# Altium PCB Master.PcbDoc (part 2 of 4)
Units mm, origin at the board's own origin, x right, y up, seen from the top; angles counter-clockwise.
Board outline 150 x 100 mm, 4 copper layers (Top Layer, GND-Layer, PWR-Layer, Bottom Layer), stack 1.586 mm thick; 231 components, 152 nets, 715 pads, 841 vias.
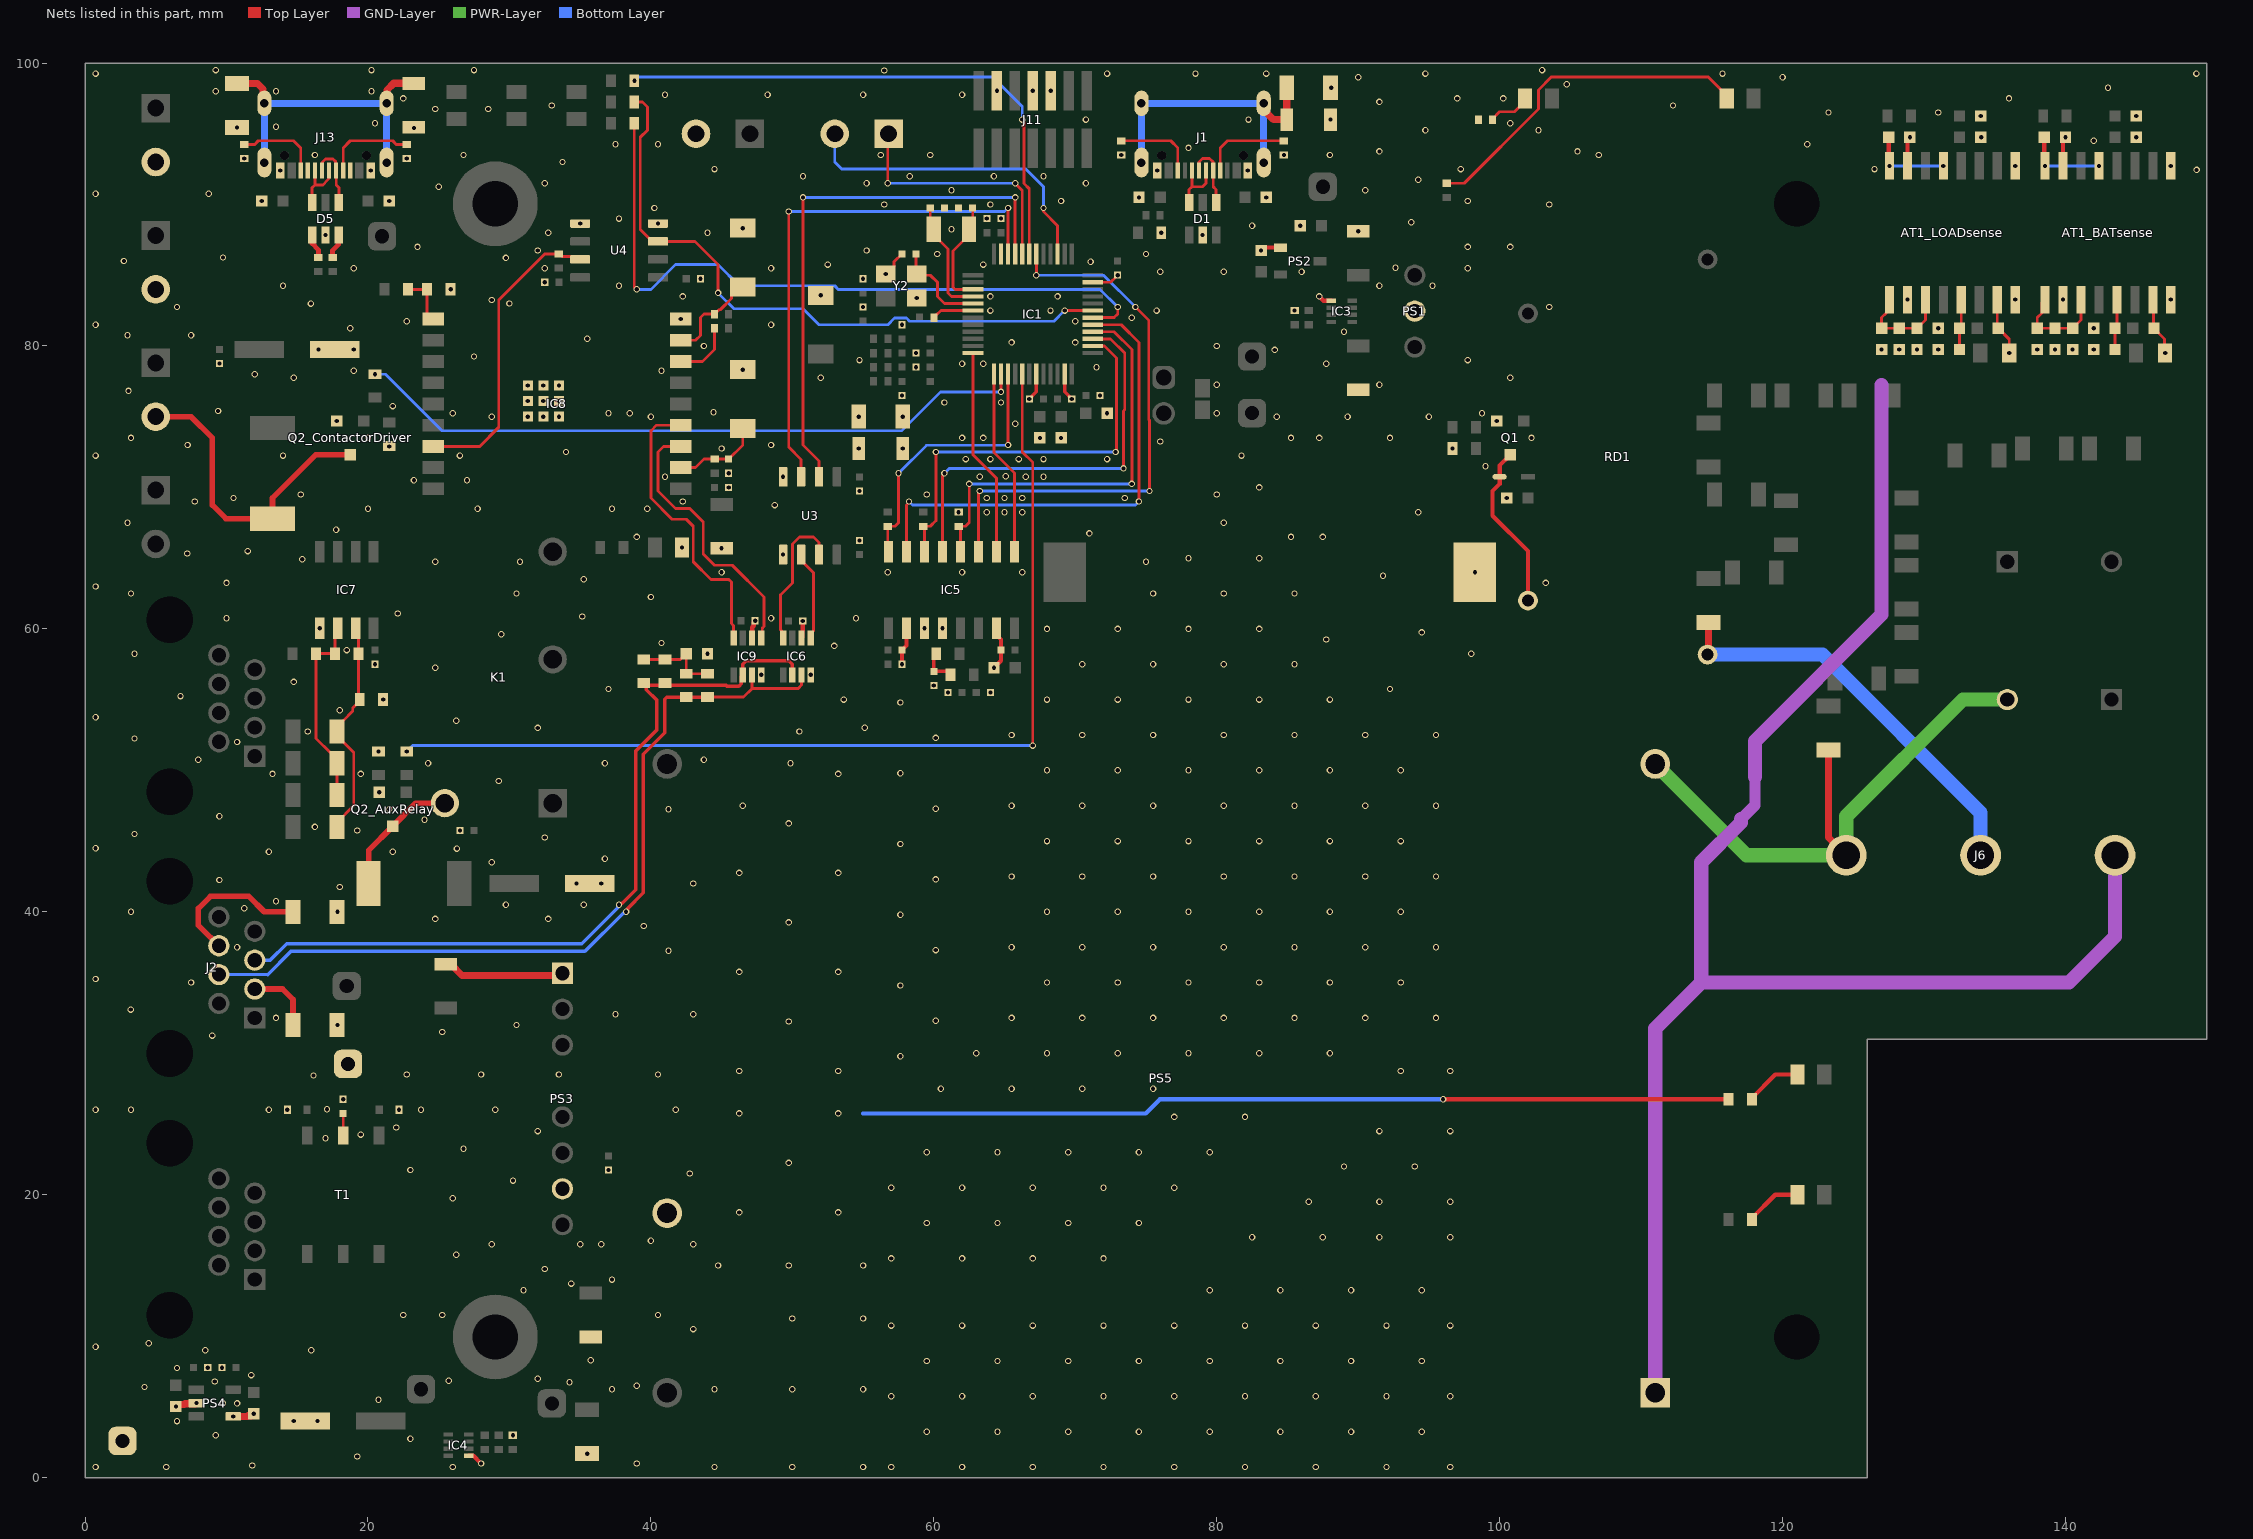
[diagram p4: the nets of this part, all layers, seen from the top]

## Part data
AT1_BATsense AT1_LOADsense: "Attenuator or Isolator", Manufacturer_Name="Texas Instruments", Mouser Part Number=595-AMC3330QDWERQ1, Arrow Part Number=AMC3330QDWERQ1, Arrow Price/Stock=https://www.arrow.com/en/products/amc3330qdwerq1/texas-instruments?utm_currency=USD&region=nac, Datasheet Link=https://www.ti.com/lit/ds/symlink/amc3330.pdf?ts=1605812770714&ref_url=https%253A%252F%252Fwww.ti.com%252Fsitesearch%252Fdocs%252Funiversalsearch.tsp%253FsearchTerm%253DAMC3330DWE, Height=2.65mm, Manufacturer_Part_Number=AMC3330QDWERQ1, Mouser Price/Stock=https://www.mouser.co.uk/ProductDetail/Texas-Instruments/AMC3330QDWERQ1?qs=81r%252BiQLm7BThq9fK1XpIYg%3D%3D
C1 C9 C15 C18 C19 C20 C21 C25 C28 C29 C30 C32 C38 C39 C40 C41 C43 C55 C59 C60 C68_AuxRelay C68_ContactorDriver: library part CMP-001-01308-5, "GTT Standard 0402 non-polarized capacitor", Case/Package=0402, JLCPCB Part #=C1525, Category="Multilayer Ceramic Chip Capacitors", Ceramic Type=X7R, Pins=2
  C30 C32 C38 C39 C40 C41 C43 C59 C60: ClassName=TPL_Trans
C2 C3 C33 C56 C57: library part CMP-001-01309-1, "GTT Standard 0603 non-polarized capacitor", Case/Package=0603, JLCPCB Part #=C23630, Category="Multilayer Ceramic Chip Capacitors", Ceramic Type=X7R, Pins=2
  C33: ClassName=TPL_Trans
C4 C58 C63: library part CMP-001-01311-1, "GTT Standard 1206 non-polarized capacitor", Case/Package=1206, JLCPCB Part #=C9196, Voltage Rating=2kV, Category="Multilayer Ceramic Chip Capacitors", Ceramic Type=X7R, Pins=2
C5 C6: library part CMP-001-01308-5, "GTT Standard 0402 non-polarized capacitor", Case/Package=0402, JLCPCB Part #=C32949, Category="Multilayer Ceramic Chip Capacitors", Ceramic Type=X7R, Pins=2
C7 C8: library part CMP-001-01308-5, "GTT Standard 0402 non-polarized capacitor", Case/Package=0402, JLCPCB Part #=C1549, Category="Multilayer Ceramic Chip Capacitors", Ceramic Type=X7R, Pins=2
C10 C13 C14 C16 C48_BATsense C48_LOADsense C51_BATsense C51_LOADsense: library part CMP-001-01309-1, "GTT Standard 0603 non-polarized capacitor", Case/Package=0603, JLCPCB Part #=C15849, Category="Multilayer Ceramic Chip Capacitors", Ceramic Type=X7R, Pins=2
C11 C12 C22 C24: library part CMP-001-01311-1, "GTT Standard 1206 non-polarized capacitor", Case/Package=1206, JLCPCB Part #=C12891, Voltage Rating=25V, Category="Multilayer Ceramic Chip Capacitors", Ceramic Type=X7R, Pins=2
C17 C26 C27: library part CMP-001-01309-1, "GTT Standard 0603 non-polarized capacitor", Case/Package=0603, JLCPCB Part #=C19666, Category="Multilayer Ceramic Chip Capacitors", Pins=2
  C17: Ceramic Type=X7R
  C26 C27: Ceramic Type=X5R
C23 C62_AuxRelay C62_ContactorDriver: "Capacitor Polarised", JLCPCB Part #=C176664, Manufacturer_Name=Lelon, Datasheet Link=https://www.mouser.de/datasheet/2/231/161587198639-2307150.pdf, Height=8mm, Manufacturer_Part_Number=VEJ101M1ETR-0607
C31: library part CMP-001-01308-5, "GTT Standard 0402 non-polarized capacitor", Case/Package=0402, JLCPCB Part #=C1523, Category="Multilayer Ceramic Chip Capacitors", Ceramic Type=X7R, ClassName=TPL_Trans, Pins=2
C34 C36: library part CMP-001-01308-5, "GTT Standard 0402 non-polarized capacitor", Case/Package=0402, JLCPCB Part #=C190580, Category="Multilayer Ceramic Chip Capacitors", Ceramic Type=X7R, ClassName=TPL_Trans, Pins=2
C35 C69_BATsense C69_LOADsense C71_BATsense C71_LOADsense: library part CMP-001-01308-5, "GTT Standard 0402 non-polarized capacitor", Case/Package=0402, JLCPCB Part #=C1538, Category="Multilayer Ceramic Chip Capacitors", Ceramic Type=X7R, Pins=2
  C35: ClassName=TPL_Trans
C37: library part CMP-001-01308-5, "GTT Standard 0402 non-polarized capacitor", Case/Package=0402, JLCPCB Part #=C1546, Category="Multilayer Ceramic Chip Capacitors", Ceramic Type=X7R, ClassName=TPL_Trans, Pins=2
C42: library part CMP-001-01309-1, "GTT Standard 0603 non-polarized capacitor", Case/Package=0603, JLCPCB Part #=C1622, Category="Multilayer Ceramic Chip Capacitors", Ceramic Type=X7R, Pins=2
C44 C46_BATsense C46_LOADsense C52_BATsense C52_LOADsense C53_BATsense C53_LOADsense: library part CMP-001-01309-1, "GTT Standard 0603 non-polarized capacitor", Case/Package=0603, JLCPCB Part #=C14663, Category="Multilayer Ceramic Chip Capacitors", Ceramic Type=X7R, Pins=2
C45_BATsense C45_LOADsense: library part CMP-001-01309-1, "GTT Standard 0603 non-polarized capacitor", Case/Package=0603, JLCPCB Part #=C57112, Category="Multilayer Ceramic Chip Capacitors", Ceramic Type=X7R, Pins=2
C47_BATsense C47_LOADsense C49_BATsense C49_LOADsense C50_BATsense C50_LOADsense: library part CMP-001-01309-1, "GTT Standard 0603 non-polarized capacitor", Case/Package=0603, JLCPCB Part #=C1588, Category="Multilayer Ceramic Chip Capacitors", Ceramic Type=X7R, Pins=2
C54: library part CMP-001-01311-1, "GTT Standard 1206 non-polarized capacitor", Case/Package=1206, JLCPCB Part #=C13585, Category="Multilayer Ceramic Chip Capacitors", Ceramic Type=X7R, Pins=2
C61: library part CMP-001-01308-5, "GTT Standard 0402 non-polarized capacitor", Case/Package=0402, JLCPCB Part #=C52923, Category="Multilayer Ceramic Chip Capacitors", Ceramic Type=X7R, Pins=2
C70_BATsense C70_LOADsense: library part CMP-001-01308-5, "GTT Standard 0402 non-polarized capacitor", Case/Package=0402, JLCPCB Part #=C16772, Category="Multilayer Ceramic Chip Capacitors", Ceramic Type=X7R, Pins=2
D1 D5: library part CMP-004-00059-1, Design Item ID=USBLC6-2SC6, Source=USBLC6-2SC6.SchLib
D2 D3: library part CMP-004-00097-1, "PESD5V0V1BB - Very low capacitance bidirectional ESD protection diode", Manufacturer_Name=Nexperia, Mouser Part Number=771-PESD5V0V1BB115, Arrow Part Number=PESD5V0V1BB,115, Arrow Price/Stock=https://www.arrow.com/en/products/pesd5v0v1bb115/nexperia?region=nac, Datasheet Link=https://assets.nexperia.com/documents/data-sheet/PESD5V0V1BB.pdf, Design Item ID=PESD5V0V1BB,115, Height=0.65mm, Manufacturer_Part_Number=PESD5V0V1BB,115, Mouser Price/Stock=https://www.mouser.co.uk/ProductDetail/Nexperia/PESD5V0V1BB115?qs=GcY6OjH1zdkfLKV5vNnV%252BA%3D%3D, Source=TempSchematics.schlib
D4: library part CMP-07163-000040-1, "DIODE GEN PURP 75V 150MA SOD323F", Average Rectified Current=150mA, Forward Voltage=1V, Max Forward Surge Current (Ifsm)=2A, Max Operating Temperature=150°C, Max Repetitive Reverse Voltage (Vrrm)=75V, Min Operating Temperature=-55°C, Package Quantity=1, Peak Reverse Current=5uA, Power Dissipation=200mW, Contact Plating=Tin, Element Configuration=Single, Forward Current=150mA, Height=1mm, Lead Free="Lead Free", Length=1.8mm, Max Reverse Voltage (DC)=75V, Mount="Surface Mount", Number of Pins=2, Packaging="Tape and Reel", Radiation Hardening=No, REACH SVHC="No SVHC", Recovery Time=4ns, Reverse Recovery Time=4ns, Reverse Voltage=75V, Weight=0.0276g, Width=1.35mm
D6_AuxRelay D6_ContactorDriver: library part CMP-02539-000066-1, "DIODE SCHOTTKY 40V 3A DO214AB", Average Rectified Current=3A, Case/Package=SMC, Forward Voltage=500mV, JLCPCB Part #=C3008890, Max Operating Temperature=125°C, Max Repetitive Reverse Voltage (Vrrm)=40V, Max Reverse Current=500uA, Max Surge Current=100A, Min Operating Temperature=-55°C, Package Quantity=3500, Element Configuration=Single, Forward Current=3A, Max Reverse Leakage Current=500uA, Max Reverse Voltage (DC)=40V, Mount="Surface Mount", Number of Pins=2, Packaging="Tape and Reel", Peak Non-Repetitive Surge Current=100A, Radiation Hardening=No, RoHS Compliant=Yes, Series=-
FB1: library part CMP-0686-00557-7, "Chip Ferrite Bead, 0603, 120Ω @ 100MHz, 0.05Ω, 25%, 2A", Case Code (Imperial)=0603, Case Code (Metric)=1608, Current Rating=2A, DC Resistance (DCR)=50mR, Frequency=100MHz, Max Operating Temperature=125°C, Min Operating Temperature=-55°C, Package Quantity=1, Tolerance=25%, Case/Package=0603, Core Material=Ferrite, DC Current=2A, Depth=0.8mm, Height=0.8mm, Impedance=120R, Lead Free="Lead Free", Length=1.6mm, Material=Steel, Max Current Rating=2A, Max DC Current=2A, Number of Circuits=1, Number of Lines=1, Number of Pins=2, Packaging="Tape and Reel", Radiation Hardening=No, REACH SVHC="No SVHC", RoHS Compliant=Yes, Shielding=Unshielded, Termination=SMD/SMT, Test Frequency=100MHz, Width=0.8mm
IC1: library part CMP-031-00032-4, "ARM Microcontrollers - MCU Mainstream Arm Cortex-M4+ MCU 170MHz with 512Kbytes of Flash memory", Manufacturer_Name=STMicroelectronics, Mouser Part Number=511-STM32G491CET6, Arrow Part Number=STM32G491CET6, Arrow Price/Stock=https://www.arrow.com/en/products/stm32g491cet6/stmicroelectronics?region=nac, Datasheet Link=https://cz.mouser.com/datasheet/2/389/dm00654712-2042072.pdf, Design Item ID=STM32G491CET6, Height=1.6mm, Manufacturer_Part_Number=STM32G491CET6, Mouser Price/Stock=https://www.mouser.co.uk/ProductDetail/STMicroelectronics/STM32G491CET6?qs=eP2BKZSCXI5LxAF%2FNuF5Tg%3D%3D, Source=TempSchematics.schlib
IC3 IC4: library part CMP-031-00025-3, "Power MUX", Manufacturer_Name="Texas Instruments", Mouser Part Number=595-TPS2116DRLR, Arrow Part Number=TPS2116DRLR, Arrow Price/Stock=https://www.arrow.com/en/products/tps2116drlr/texas-instruments?region=nac, Datasheet Link=https://www.ti.com/lit/gpn/tps2116, Design Item ID=TPS2116DRLR, Height=0.6mm, Manufacturer_Part_Number=TPS2116DRLR, Mouser Price/Stock=https://www.mouser.co.uk/ProductDetail/Texas-Instruments/TPS2116DRLR?qs=aP1CjGhiNiGo3XAyXcVPaQ%3D%3D, Source=TempSchematics.schlib
IC5: library part CMP-031-00034-2, "Interface - Specialized Isolated network high speed transceiver", Manufacturer_Name=NXP, Mouser Part Number=841-MC33664ATL1EG, Arrow Part Number=MC33664ATL1EG, Arrow Price/Stock=https://www.arrow.com/en/products/mc33664atl1eg/nxp-semiconductors?region=nac, Datasheet Link=http://www.nxp.com/docs/en/data-sheet/MC33664_SDS.pdf, Design Item ID=MC33664ATL1EG, Height=1.75mm, Manufacturer_Part_Number=MC33664ATL1EG, Mouser Price/Stock=https://www.mouser.co.uk/ProductDetail/NXP-Semiconductors/MC33664ATL1EG?qs=ifm8N2KdrcYav8QSnSftXQ%3D%3D, Source=TempSchematics.schlib
IC6 IC9: "Integrated Circuit", JLCPCB Part #=C32428067, Manufacturer_Name=TI, Datasheet Link=https://www.ti.com/lit/ds/symlink/tcan3404-q1.pdf, Height=1.1mm, Manufacturer_Part_Number=TCAN3404DDFRQ1
IC7: "Integrated Circuit", Arrow Part Number=SP3485EN-L/TR, JLCPCB Part #=C8963, Manufacturer_Name=MaxLinear, Mouser Part Number=701-SP3485EN-L/TR, Arrow Price/Stock=https://www.arrow.com/en/products/sp3485en-ltr/maxlinear-inc?region=nac, Datasheet Link=https://www.maxlinear.com/ds/sp3485.pdf, Height=1.75mm, Manufacturer_Part_Number=SP3485EN-L/TR, Mouser Price/Stock=https://www.mouser.co.uk/ProductDetail/MaxLinear/SP3485EN-L-TR?qs=3EMgrMjM0fbQ17liGrle%2Fg%3D%3D
IC8: "Integrated Circuit", Manufacturer_Name="Espressif Systems", Mouser Part Number=356-ESP32C3WROM02UN4, Datasheet Link=https://www.espressif.com/sites/default/files/documentation/esp32-c3-wroom-02_datasheet_en.pdf, Height=3.35mm, Manufacturer_Part_Number=ESP32-C3-WROOM-02U-N4, Mouser Price/Stock=https://www.mouser.co.uk/ProductDetail/Espressif-Systems/ESP32-C3-WROOM-02U-N4?qs=pBJMDPsKWf2Ces2aXBSNjQ%3D%3D
J1 J13: library part CMP-002-000088-9, "WR-USB 2.0 Type C, Receptacle, Horizontal, SMT", Manufacturer="Wurth Elektronik", Manufacturer Part Number=629722000214, Operating Temperature Max=85°C, Operating Temperature Min=-40°C, Rated Current=5A, Working Voltage=20VAC, Application="USB 2.0", Category="Input/Output Connectors", Component Type=Standard, ComponentLink1Description="Website Link", ComponentLink1URL=https://www.we-online.com/redexpert/article/629722000214?ad, ComponentLink2Description="Datasheet Link", ComponentLink2URL=https://www.we-online.com/redexpert/spec/629722000214?ad, Design Item ID=629722000214, Gender=Receptacle, Interface Type="Type C", Match Code=WR-USB, Mount="Surface Mount", Number of Pins=16, Number of Ports=1, Orientation=Horizontal, Packaging="Tape and Reel", Pin Count=13, Source=WR-USB.SchLib
J2 J3 J10: "Connector", Manufacturer_Name=FG, Datasheet Link=https://www.lcsc.com/datasheet/lcsc_datasheet_2306211558_FG-RJ-804-1-6_C7205183.pdf, Height=11.7mm, Manufacturer_Part_Number=RJ-804-1-6
J4 J5 J7 J8 J9 J12: "Connector", Manufacturer_Name="Cixi Dibo Electronics Co.,LTD", Datasheet Link=https://datasheet.lcsc.com/szlcsc/1910111742_DIBO-DB125-3-81-2P_C395878.pdf, Height=8.8mm, Manufacturer_Part_Number=DB125-3.81-2P
J6: "Connector", JLCPCB Part #=C162697, Manufacturer_Name="Ningbo Kangnex", Datasheet Link=https://datasheet.lcsc.com/szlcsc/Ningbo-Kangnex-Elec-HB9500-3_C162697.pdf, Height=13.2mm, Manufacturer_Part_Number=HB9500M-9.5-3P
J11: library part CMP-02766-001412-1, "CONN HEADER SMD 14POS 1.27MM", Housing Color=Black, Max Operating Temperature=125°C, Min Operating Temperature=-55°C, Contact Material=Bronze, Contact Plating=Gold, Depth=5.84mm, Gender=Male, Housing Material=Polymer, Lead Free="Lead Free", Length=8.89mm, Number of Contacts=14, Number of Rows=2, Orientation=Straight, Packaging=Rail/Tube, Pitch=1.27mm, Radiation Hardening=No, RoHS Compliant=Yes, Termination=Solder
K1: library part CMP-08822-000148-1, "RELAY GEN PURPOSE SPST 10A 5V", Coil Current=40mA, Coil Power=200mW, Coil Resistance=125R, Coil Voltage (DC)=5V, Contact Current Rating=10A, Max Operating Temperature=105°C, Max Voltage Rating (AC)=277V, Max Voltage Rating (DC)=30V, Min Operating Temperature=-40°C, Package Quantity=400, Power Consumption=2mW, Approvals=UL, Coil Type=Non-Latching, Contact Material=Silver, Current Rating=10A, Depth=10.3mm, Length=20.3mm, Max Current Rating=10A, Mount="Through Hole", Number of Pins=4, Operate Time=10ms, Packaging=Bulk, Radiation Hardening=No, Relay Type="General Purpose", Release Time=5ms, Series=G5Q, Termination="PC Pin", Throw Configuration=SPST, Voltage Rating (AC)=277V, Weight=6.5g
LED1 LED3: library part KT-0805G, "LED", JLCPCB Part #=C34499, Manufacturer_Name="Hubei KENTO Elec", Datasheet Link=https://jlcpcb.com/api/file/downloadByFileSystemAccessId/8639582106239348736, Height=0.95mm, Manufacturer_Part_Number=KT-0805G
LED2 LED4 LED9: "LED", JLCPCB Part #=C2297, Manufacturer_Name="Hubei KENTO Elec", Datasheet Link=https://jlcpcb.com/api/file/downloadByFileSystemAccessId/8639582106239348736, Height=0.95mm, Manufacturer_Part_Number=KT-0805G
LED7: library part KT-0805G, "LED", JLCPCB Part #=C84256, Manufacturer_Name="Hubei KENTO Elec", Datasheet Link=https://jlcpcb.com/api/file/downloadByFileSystemAccessId/8639582106239348736, Height=0.95mm, Manufacturer_Part_Number=KT-0805G
LED8 LED10: library part KT-0805G, "LED", JLCPCB Part #=C2296, Manufacturer_Name="Hubei KENTO Elec", Datasheet Link=https://jlcpcb.com/api/file/downloadByFileSystemAccessId/8639582106239348736, Height=0.95mm, Manufacturer_Part_Number=KT-0805G
P1: library part CMP-002-00755-1, "WR-PHD Pin Header, THT, Vertical, pitch 2.54mm, 1 Row, 2P", Contact Resistance=20mO, Manufacturer="Wurth Elektronik", Operating Temperature Max=105°C, Operating Temperature Min=-40°C, Rated Current=3A, Withstanding Voltage=500V, Working Voltage=250V, Category="Board-to-Board Connectors", Component Type=Standard, ComponentLink1Description="Website Link", ComponentLink1URL=https://www.we-online.com/redexpert/article/61300211121?ad, ComponentLink2Description="Datasheet Link", ComponentLink2URL=https://www.we-online.com/redexpert/spec/61300211121?ad, Design Item ID=61300211121, Gender="Pin Header", Manufacturer Part Number=61300211121, Match Code=WR-PHD, Mount="Through Hole", Number of Rows=1, Orientation=Vertical, Packaging=Bag, Pin Count=2, Pins=2, Pitch=2.54mm, Source=WR-PHD.SchLib
PS1: "Power Supply", JLCPCB Part #=C19188491, Manufacturer_Name=EVISUN, Height=10.41mm, Manufacturer_Part_Number=K7805-500R3
PS2: "Power Supply", Manufacturer_Name=Torex, Mouser Part Number=865-XC6206P332MR-G, Datasheet Link=https://www.torexsemi.com/file/xc6206/XC6206.pdf, Height=1.3mm, Manufacturer_Part_Number=XC6206P332MR-G, Mouser Price/Stock=https://www.mouser.co.uk/ProductDetail/Torex-Semiconductor/XC6206P332MR-G?qs=AsjdqWjXhJ%2FXxNpRY3zZ8g%3D%3D
PS3: "Power Supply", JLCPCB Part #=C22437321, Manufacturer_Name=EVISUN, Datasheet Link=https://jlc-prod-smt.oss-eu-central-1.aliyuncs.com/smtDataManualFile/8763072730084188160-C22437321.pdf?response-content-disposition=attachment%3B%20filename%3DC22437321.pdf%3B%20filename%2A%3DUTF-8%27%27C22437321.pdf&x-oss-date=20260715T193454Z&x-oss-expires=3600&x-oss-security-token=CAISgAN1q6Ft5B2yfSjIr5vGB4%2FWvadn2vqmc1aEsUE0QuZpjqjbpjz2IHhMdHJsAOodtv0%2FmmhT6PkclqRLcbhpcmfjV%2BZHzLB8qZ1MhF5f4J7b16cNrbH4M4H6aXeirtuwDsz9SNTCALjPD3nPii50x5bjaDymRCbLGJaViJlhHLN1Ow6jdmhpCctxLAlvo9NgFxm3D%2Fu2NQPwiWf9FVdhvhEG6Vly8qOi2MaRmFy8yFTx0b0SvJ%2BjYMrmPctoN9JnSdC5mfdzau3a1TJ84gRD0a5wkaVA1zbDs5bfISEIuUzebreLqY03dV4mOvdqIcMe8qigz88fk%2FfIioH6xyxKOexoSCnFTOiiupCcQLPyao9jLu6iayqViY7QaIOTqQohZmkAMwVOasAsI3Ngh4zF97Qt0cVNkXO9gWfLI8DtuMleWgprXccO%2BnSgc5lCkRRYwGs1287ugXlSQzo890KPDAEovaKCnZ2ZSfh7Y4sNknI6i%2Bfc2Se2MIkIyKE0YqKWD5sagAECs9NCpk8KgfXfWYxhKhKZsha9ngqEXyXXVVOpb2GGT6djF3S%2FLTKh30%2B6uTt7oH6XhzPlB7WR%2Fa7FsvHfaJ62Hu2KaBZEBf7KJcteyMD33hzIrNZl9%2F9XvPXuCryTgxV1ie4rkrvTaUkWCQr%2BRp6R1%2FN9Ic7TFTQ1orsPZrHwHCAA&x-oss-signature-version=OSS4-HMAC-SHA256&x-oss-credential=STS.NXsL5bPxFm8Mqp5UAaNiEampD%2F20260715%2Feu-central-1%2Foss%2Faliyun_v4_request&x-oss-signature=73c165591a835ffcff11ee9ad605e23bde33f7af0c5ec7bf6709df0808843322, Height=12.25mm, Manufacturer_Part_Number=WRB1203S-3WR2
PS4: library part CMP-04917-000028-1, "IC REG LINEAR 3.3V 1A SOT23-5", Dropout Voltage=1350mV, Manufacturer="Texas Instruments", Max Junction Temp=+125°C, Max Supply Voltage=5.5V, Min Supply Voltage=1.45V, Output Current=1A, Output Voltage=3.3V, Package=DBV0005A, Temperature="-40°C to +125°C", Temperature Range Low=-40°C, Accuracy Percentage=1%, Automotive=No, Category=IC, ComponentLink2Description=Datasheet, ComponentLink2URL=http://www.ti.com/lit/ds/symlink/tlv757p.pdf, Device Class L1="Integrated Circuits (ICs)", Device Class L2="Power Management ICs", Device Class L3="Voltage Regulators - Linear", Digikey Description="IC REG LINEAR 3.3V 1A SOT23-5", Height=1.45mm, Ipc Land Pattern Name=SOT95P280X145-5, Lead Free=Yes, Manufacturer Part Number=TLV75733PDBVR, Mouser Description="1-A low-IQ small-size low-dropout (LDO) regulator 5-SOT-23 -40 to 125", Number Of Outputs=1, Octopart=https://octopart.com/tlv75733pdbvr-texas+instruments-91437073, Output Type=Fixed, RoHS=TRUE, Standoff Height=0mm, Temperature Range High=+125°C
PS5: "Power Supply", Manufacturer_Name="Mean Well", Arrow Part Number=DDRH-15-12P, Arrow Price/Stock=https://www.arrow.com/en/products/ddrh-15-12p/mean-well-enterprises?utm_currency=USD&region=nac, Datasheet Link=https://www.meanwell.com/webapp/product/search.aspx?prod=DDRH-15, Height=25.03mm, Manufacturer_Part_Number=DDRH-15-12P
Q1 Q2_AuxRelay Q2_ContactorDriver: library part CMP-83955-000006-1, "MOSFET N-CH 30V 5.7A SOT23", Case/Package=SOT-23, Continuous Drain Current (ID)=5.7A, Drain to Source Voltage (Vdss)=30V, Gate to Source Voltage (Vgs)=12V, Input Capacitance=630pF, Max Operating Temperature=150°C, Max Power Dissipation=1.4W, Min Operating Temperature=-55°C, Lead Free="Lead Free", Mount="Surface Mount", Number of Elements=1, Number of Pins=3, Packaging="Tape and Reel", Power Dissipation=1.4W, Radiation Hardening=No, Rds On Max=26.5mR
R1: library part CMP-009-00204-17, "GTT Standard 0402 Resistor", Case/Package=0402, JLCPCB Part #=C25079, Power=62.5mW, Tolerance=1%, Voltage Rating=50V, Design Item ID="RES 0402", Mounting Technology=SMD, Source=Passives.SchLib
R2 R12: library part CMP-009-00204-17, "GTT Standard 0402 Resistor", Case/Package=0402, JLCPCB Part #=C25779, Power=62.5mW, Tolerance=1%, Voltage Rating=50V, Design Item ID="RES 0402", Mounting Technology=SMD, Source=Passives.SchLib
R3 R5 R22 R23 R26 R60 R62: library part CMP-009-00204-17, "GTT Standard 0402 Resistor", Case/Package=0402, JLCPCB Part #=C25905, Power=62.5mW, Tolerance=1%, Voltage Rating=50V, Design Item ID="RES 0402", Mounting Technology=SMD, Source=Passives.SchLib
R4 R11: library part CMP-009-00206-3, "GTT Standard 0603 Resistor", Case/Package=0603, JLCPCB Part #=C23254, Power=62.5mW, Tolerance=1%, Voltage Rating=50V, Mounting Technology=SMD
R6 R47_BATsense R47_LOADsense R48_BATsense R48_LOADsense R49_BATsense R49_LOADsense R50_BATsense R50_LOADsense R51_BATsense R51_LOADsense R52_BATsense R52_LOADsense R53_BATsense R53_LOADsense R54_BATsense R54_LOADsense R64 R69: library part CMP-009-00208-3, "GTT Standard 1206 Resistor", Case/Package=1206, JLCPCB Part #=C17927, Power=62.5mW, Tolerance=1%, Voltage Rating=50V, Mounting Technology=SMD
R7 R8 R45_BATsense R45_LOADsense R46_BATsense R46_LOADsense R58 R59 R65 R66: library part CMP-009-00204-17, "GTT Standard 0402 Resistor", Case/Package=0402, JLCPCB Part #=C25752, Power=62.5mW, Tolerance=1%, Voltage Rating=50V, Design Item ID="RES 0402", Mounting Technology=SMD, Source=Passives.SchLib
R9 R37 R38 R39 R42: library part CMP-009-00208-3, "GTT Standard 1206 Resistor", Case/Package=1206, JLCPCB Part #=DNP, Power=62.5mW, Tolerance=1%, Voltage Rating=50V, Mounting Technology=SMD
R10 R13: library part CMP-009-00204-17, "GTT Standard 0402 Resistor", Case/Package=0402, JLCPCB Part #=C25741, Power=62.5mW, Tolerance=1%, Voltage Rating=50V, Design Item ID="RES 0402", Mounting Technology=SMD, Source=Passives.SchLib
R14: library part CMP-009-00204-17, "GTT Standard 0402 Resistor", Case/Package=0402, JLCPCB Part #=C25794, Power=62.5mW, Tolerance=1%, Voltage Rating=50V, Design Item ID="RES 0402", Mounting Technology=SMD, Source=Passives.SchLib
R15: library part CMP-009-00204-17, "GTT Standard 0402 Resistor", Case/Package=0402, JLCPCB Part #=C25900, Power=62.5mW, Tolerance=1%, Voltage Rating=50V, Design Item ID="RES 0402", Mounting Technology=SMD, Source=Passives.SchLib
R16: library part CMP-009-00206-3, "GTT Standard 0603 Resistor", Case/Package=0603, JLCPCB Part #=C25808, Power=62.5mW, Tolerance=1%, Voltage Rating=50V, Mounting Technology=SMD
R17 R18: library part CMP-009-00206-3, "GTT Standard 0603 Resistor", Case/Package=0603, JLCPCB Part #=C22790, Power=62.5mW, Tolerance=1%, Voltage Rating=50V, Mounting Technology=SMD
R24 R25: library part CMP-009-00206-3, "GTT Standard 0603 Resistor", Case/Package=0603, JLCPCB Part #=C4275, Power=62.5mW, Tolerance=1%, Voltage Rating=50V, Mounting Technology=SMD
R27 R28 R29 R30 R32: library part CMP-009-00206-3, "GTT Standard 0603 Resistor", Case/Package=0603, JLCPCB Part #=C22787, Power=62.5mW, Tolerance=1%, Voltage Rating=50V, Mounting Technology=SMD
R31 R33: library part CMP-009-00206-3, "GTT Standard 0603 Resistor", Case/Package=0603, JLCPCB Part #=C23151, Power=62.5mW, Tolerance=1%, Voltage Rating=50V, Mounting Technology=SMD
R34 R35 R36 R57: library part CMP-009-00206-3, "GTT Standard 0603 Resistor", Case/Package=0603, JLCPCB Part #=C23138, Power=62.5mW, Tolerance=1%, Voltage Rating=50V, Mounting Technology=SMD
R40 R41: library part CMP-009-00208-3, "GTT Standard 1206 Resistor", Case/Package=1206, JLCPCB Part #=C17888, Power=62.5mW, Tolerance=1%, Voltage Rating=50V, Mounting Technology=SMD
R43 R67_AuxRelay R67_ContactorDriver: library part CMP-009-00206-3, "GTT Standard 0603 Resistor", Case/Package=0603, JLCPCB Part #=C23345, Power=62.5mW, Tolerance=1%, Voltage Rating=50V, Mounting Technology=SMD
R44 R56_BATsense R56_LOADsense R68_AuxRelay R68_ContactorDriver: library part CMP-009-00206-3, "GTT Standard 0603 Resistor", Case/Package=0603, JLCPCB Part #=C25819, Power=62.5mW, Tolerance=1%, Voltage Rating=50V, Mounting Technology=SMD
R55_BATsense R55_LOADsense: library part CMP-009-00205-3, "GTT Standard 0805 Resistor", Case/Package=0805, JLCPCB Part #=C17414, Power=62.5mW, Tolerance=1%, Voltage Rating=50V, Mounting Technology=SMD
R61 R63: library part CMP-009-00204-17, "GTT Standard 0402 Resistor", Case/Package=0402, JLCPCB Part #=C17168, Power=62.5mW, Tolerance=1%, Voltage Rating=50V, Design Item ID="RES 0402", Mounting Technology=SMD, Source=Passives.SchLib
RT1 RT2: library part CMP-009-00210-4, "VISHAY - PTCEL67R501TBE - PTC THERMISTOR", JLCPCB Part #=C23949633, Max Operating Temperature=105°C, Min Operating Temperature=-40°C, R25 value="500 Ohms", Voltage Rating=1.2kV, ClassName=HV, ComponentLink1Description=Datasheet, ComponentLink1URL=https://www.vishay.com/docs/29207/ptcel_highenergy-series.pdf, Mounting Technology="Through hole mount", Pins=2, RoHS Compliant=yes
S1 S2 S3: "Switch", Manufacturer_Name=XUNPU, Datasheet Link=https://www.xunpudianzi.com/uploads/pdf/TS-1088-ARXXX.pdf, Height=2mm, Manufacturer_Part_Number=TS-1088-AR02016
T1: library part CMP-16309-000039-1, "XFMR CMC MODULE AECQ BATT MNGT", Inductance Primary=150uH, Isolation Voltage=4300VDC, JLCPCB Part #=C962543, Manufacturer=Pulse, Package=0, Temperature="-40°C to +125°C", Temperature Range High=+125°C, Temperature Range Low=-40°C, Automotive=Yes, Automotive Grade="Grade 1", Category=Trans, ClassName=TPL_Trans, ComponentLink2Description=Datasheet, ComponentLink2URL=https://productfinder.pulseeng.com/product/HM2103NL, Device Class L1="Passive Components", Device Class L2=Transformers, Device Class L3=unset, Digikey Description="XFMR CMC MODULE AECQ BATT MNGT", Height=5.72mm, Insertion Loss=0.25dB, Lead Free=Yes, Manufacturer Part Number=HM2103NL, Obsolete Part=false, Octopart=https://octopart.com/hm2103nl-pulse-87646222, Return Loss=20dB, RoHS=TRUE, Standoff Height=0.13mm, Turns Ratio=1:1
TP1 TP2 TP3 TP4 TP5 TP6 TP8 TP9 TP10: library part CMP-00030-00001-7, Design Item ID=GTT_ProbeerPunt, Source=GTT_MainComponentLibrary.SchLib
U1: "Undefined or Miscellaneous", Manufacturer_Name=Q&J, Datasheet Link=https://datasheet.lcsc.com/szlcsc/Q-J-CR2032-BS-6-1_C70377.pdf, Height=6mm, Manufacturer_Part_Number=CR2032-BS-6-1
U3 U4: library part CMP-04872-000019-2, "DGTL ISO 3KV GEN PRP 8SOIC", Case/Package=SOIC, Isolated Power=No, Max Operating Temperature=125°C, Min Operating Temperature=-55°C, Channel Type=Unidirectional, Data Rate=100Mbps, Mount="Surface Mount", Number of Channels=2, Number of Pins=8, Packaging="Tape and Reel", Propagation Delay=16ns, Pulse Width Distortion (PWD)=4.9ns, Type="General Purpose"
Y1: "Crystal or Oscillator", Manufacturer_Name="Seiko Epson Corporation", Manufacturer_Part_Number=Q13FC1350000400, Datasheet Link=https://datasheet.lcsc.com/szlcsc/1901081604_Seiko-Epson-Q13FC1350000400_C32346.pdf, Height=0.9mm
Y2: "Crystal or Oscillator", Manufacturer_Name="Yangxing Tech", Datasheet Link=https://datasheet.lcsc.com/szlcsc/Yangxing-Tech-X322516MLB4SI_C13738.pdf, Height=0.8mm, Manufacturer_Part_Number=X322516MLB4SI
RD1: ComponentLink1Description=Datasheet, ComponentLink1URL=https://jlcpcb.com/api/file/downloadByFileSystemAccessId/8603384602715443200

## Free pads (board coordinates)
  round 6 hole 3.2: 1(29,9.95) 2(29,90.05)
  round 0 hole 3.2 unplated: 3(121,90.05) 4(121,9.95)

## Via types
v1: diameter 0.45, hole 0.3, Top Layer to Bottom Layer, tented both sides, 841 vias

## Nets (pads, with @x,y where several pads share a name; then routed paths per layer and width w, separated by ;. In a path a pad name is that pad's centre, name@x,y a point inside that pad or via, vN(x,y) a via of type N, cw(c..) or ccw(c..) an arc to the next point about the centre after c; other vN are vias at no path point)
A: IC7.6 R32.2 R33.1 R41.1 R42.1 | length 13.8
  Top Layer w0.2: R42.1@17.802,48.25 17.802,50.825 17.377,51.25 17.335,51.25 16.327,52.258 R33.1@16.327,58.25 R32.2@17.673,58.25 17.673,59.846 IC7.6@17.865,60.038
A8: J13.A8
AUX_IO1: IC1.44 J12.1 | length 17.7
  Top Layer w0.2: v1(56.75,91.5) 56.75,94.94 J12.1@56.81,95 ; v1(65.75,91.5) 66.25,91 IC1.44@66.25,86.488
  Bottom Layer w0.2: v1(56.75,91.5) v1(65.75,91.5)
AUX_IO2: IC1.39 J12.2 | length 22.7
  Top Layer w0.2: v1(67.75,89.75) 67.755,89.745 67.755,89.495 68.75,88.5 IC1.39@68.75,86.488
  Bottom Layer w0.2: J12.2@53,95 53,93 53.495,92.505 66.495,92.505 67.75,91.25 v1(67.75,89.75)
AUX_RELAY_EN: IC1.17 R67_AuxRelay.2 | length 71
  Top Layer w0.2: IC1.17@66.25,78.012 66.25,72.5 67,71.75 v1(67,51.75)
  Bottom Layer w0.2: v1(22.75,51.327) 22.75,51.35 23.15,51.75 v1(67,51.75)
B: IC7.7 R31.2 R32.1 R39.1 R40.1 | length 15.9
  Top Layer w0.2: R40.1@17.802,46 17.802,46.325 19,47.523 19,51.25 18.25,52 18.227,52 17.802,52.425 R39.1@17.802,52.75 17.802,53.075 18.227,53.5 18.923,54.196 18.923,54.4 19.423,54.9 R31.2@19.423,55 R31.2@19.326,55 ; IC7.7@19.135,60.038 19.327,59.846 R32.1@19.327,58.25 ; R32.1@19.326,58.249 19.326,55.097 R31.2@19.423,55
B8: J13.B8
CAN_CON_PIN3: J2.3 R38.2 | length 4.8
  Top Layer w0.4: J2.3@12,34.54 13.96,34.54 14.698,33.802 R38.2@14.698,32
CAN_CON_PIN6: J2.6 R37.2 | length 10.7
  Top Layer w0.4: J2.6@9.46,37.6 9.46,37.602 8.872,38.19 8.859,38.19 8.01,39.039 8.01,40.241 8.859,41.09 11.581,41.09 12.671,40 R37.2@14.698,40
CAN_ESP32_RX: IC8.4 IC9.4 | length 20.7
  Top Layer w0.2: IC8.4@42.11,74.4 40.4,74.4 40,74 40,69.25 41.5,67.75 42.5,67.75 43,67.25 43,64.75 44.25,63.5 45.5,63.5 45.69,63.31 45.69,60.385 45.85,60.225 IC9.4@45.85,59.35
CAN_ESP32_TX: IC8.3 IC9.1 | length 19.4
  Top Layer w0.2: IC8.3@42.11,72.9 40.9,72.9 40.5,72.5 40.5,69.75 41.5,68.75 41.75,68.5 42.75,68.5 43.7,67.55 43.7,65.3 44.5,64.5 45.75,64.5 48,62.25 48,60.174 47.875,60.049 47.875,59.425 IC9.1@47.8,59.35
CAN_HI: IC6.7 IC9.7 J2.4 R27.2 R28.2 | length 58.4
  Top Layer w0.2: R27.2@44.45,55.173 46.556,55.173 47.15,55.767 IC9.7@47.15,56.75 ; 47.15,55.796 50.417,55.796 50.65,56.029 IC6.7@50.65,56.75
  Top Layer w0.248: v1(38.25,40) 38.25,40.055 38.351,40.156 38.351,40.214 39.473,41.335 39.473,51.14 40.979,52.646 40.979,55.028 41.124,55.173 42.174,55.173 42.174,55.399 42.4,55.173 R28.2@42.5,55.173 R27.2@44,55.173
  Bottom Layer w0.2: J2.4@9.46,35.56 12.915,35.56
  Bottom Layer w0.248: 12.915,35.56 14.557,37.202 35.34,37.202 38.036,39.899 38.094,39.899 38.195,40 v1(38.25,40)
CAN_LO: IC6.6 IC9.6 J2.5 R29.2 R30.2 | length 57.8
  Top Layer w0.248: v1(37.75,40.5) 37.805,40.5 37.906,40.601 37.964,40.601 38.925,41.562 38.925,51.367 40.431,52.873 40.431,54.942 39.674,55.699 39.674,55.999 R29.2@39.5,56.173 39.673,56 40.827,56 R30.2@41,56.173 41.173,56 45.32,56 45.369,55.951 46.226,55.951 46.399,56.124 46.399,56.649 46.502,56.752 46.502,57.502 46.75,57.75 49.75,57.75 49.998,57.502 49.998,56.752 IC6.6@50,56.75
  Bottom Layer w0.248: J2.5@12,36.58 13.08,36.58 14.25,37.75 35.113,37.75 37.649,40.286 37.649,40.344 37.75,40.445 v1(37.75,40.5)
CAN_RX: IC1.45 U3.2 | length 39.2
  Top Layer w0.2: v1(50.75,90.5) 50.75,73 51.885,71.865 U3.2@51.885,70.75 ; IC1.45@65.75,86.488 v1(65.75,90.5)
  Bottom Layer w0.2: v1(50.75,90.5) v1(65.75,90.5)
CAN_STM_INV_RX: IC6.4 U3.7 | length 10.2
  Top Layer w0.2: IC6.4@49.35,59.35 49.225,59.475 49.225,59.863 49.157,59.931 49.157,62.407 50,63.25 50,66 50.5,66.5 51.5,66.5 51.885,66.115 U3.7@51.885,65.25
CAN_STM_INV_TX: IC6.1 U3.6 | length 6.3
  Top Layer w0.2: U3.6@50.615,65.25 50.615,64.85 51.5,63.965 51.5,59.85 51.3,59.65 IC6.1@51.3,59.35
CAN_STM_TX: IC1.46 U3.3 | length 38
  Top Layer w0.2: v1(49.75,89.5) 49.75,72.845 50.615,71.98 U3.3@50.615,70.75 ; IC1.46@65.25,86.488 65.25,87.225 65.25,89.354 v1(65.25,89.75)
  Bottom Layer w0.2: v1(49.75,89.5) 65,89.5 v1(65.25,89.75)
CONT_EN: IC1.14 R67_ContactorDriver.2 | length 48.3
  Top Layer w0.2: v1(64.75,76.75) IC1.14@64.75,78.012
  Bottom Layer w0.2: v1(20.5,78) 21.25,78 25.25,74 57.716,74 60.466,76.75 v1(64.75,76.75)
CONTACTOR-: D6_ContactorDriver.2 J4.2 Q2_ContactorDriver.3 | length 22.2
  Top Layer w0.4: J4.2@5,75 7.5,75 9,73.5 9,68.75 9.955,67.795 D6_ContactorDriver.2@13.25,67.795 13.25,69.25 16.3,72.3 Q2_ContactorDriver.3@18.75,72.3
EN: C61.2 IC8.2 R65.1 S2.2 | length 6.2
  Top Layer w0.2: IC8.2@42.11,71.4 42.111,71.401 43.151,71.401 43.75,72 44.2,72 R65.1@44.5,72 45.25,72 C61.2@45.5,72 46.5,73 S2.2@46.5,74.175
ESP_VBUS_SENSE: IC8.10 R11.2 R16.1 | length 3.7
  Top Layer w0.2: R11.2@22.827,84 R16.1@24.173,84 24.173,82.25 24.523,81.9 IC8.10@24.61,81.9
GND: AT1_BATsense.9 AT1_BATsense.15 AT1_LOADsense.9 AT1_LOADsense.15 C1.1 C2.1 C3.1 C4.2 C5.1 C6.1 C7.1 C8.1 C9.1 C10.2 C11.1 C12.1 C13.1 C14.1 C15.1 C16.2 C17.2 C18.1 C19.1 C20.1 C21.1 C22.1 C30.1 C31.1 C32.1 C33.1 C34.2 C35.1 C36.1 C37.1 C38.1 C44.2 C48_BATsense.1 C48_LOADsense.1 C49_BATsense.1 C49_LOADsense.1 C53_BATsense.2 C53_LOADsense.2 C59.1 C62_AuxRelay.2 C62_ContactorDriver.2 C63.1 C68_AuxRelay.1 C68_ContactorDriver.1 C69_BATsense.2 C69_LOADsense.2 C71_BATsense.1 C71_LOADsense.1 D1.2 D2.2 D3.1 IC1.19 IC1.23 IC1.35 IC1.47 IC3.1 IC5.10 IC5.11 IC5.12 IC5.15 J1.A1/B12 J1.A12/B1 J7.2 J8.2 J11.5 J11.7 J11.11 PS1.2 PS2.1 PS3.1 PS5.4 Q1.2 Q2_AuxRelay.2 Q2_ContactorDriver.2 R3.1 R4.1 R5.1 R6.1 R8.1 R12.1 R26.1 R44.1 R68_AuxRelay.1 R68_ContactorDriver.1 R69.2 S1.2 TP9.1 U1.2 U3.4 U4.4 Y2.2 Y2.4 | length 28.9
  Top Layer w0.2: v1(56.598,85.092) 56.698,85.092 57.198,85.592 57.198,85.948 C6.1@57.75,86.5 ; IC1.35@71.238,84.5 72.5,84.5 72.85,84.85 v1(73,85)
  Top Layer w0.25: v1(66.75,76.25) 67.25,76.75 IC1.19@67.25,78.012 ; IC1.23@69.25,78.012 69.25,76.75 v1(69.75,76.25)
  Top Layer w0.3: v1(57.75,57.5) C31.1@57.75,58.5 58.075,58.825 IC5.10@58.075,60.038 ; v1(64.25,57.25) 64.75,57.75 C32.1@64.75,58.5 64.75,59.25 64.6,59.4 64.6,59.863 IC5.15@64.425,60.038 ; C14.1@83.15,86.75 83.35,86.95 PS2.1@84.5,86.95 ; v1(87.25,83.5) 87.55,83.2 IC3.1@88.11,83.2 ; AT1_LOADsense.15@128.825,92.725 128.825,94.575 v1(129,94.75) ; AT1_BATsense.15@139.825,92.725 139.825,94.575 v1(140,94.75)
  Top Layer w0.5: C22.1@25.5,36.3 25.85,36.3 26.65,35.5 33.59,35.5 PS3.1@33.75,35.66
  other v1: 57,0.75 62,0.75 67,0.75 72,0.75 77,0.75 82,0.75 87,0.75 92,0.75 96.5,0.75 59.5,3.25 64.5,3.25 69.5,3.25 74.5,3.25 79.5,3.25 84.5,3.25 89.5,3.25 94.5,3.25 57,5.75 62,5.75 67,5.75 72,5.75 77,5.75 82,5.75 87,5.75 92,5.75 96.5,5.75 59.5,8.25 64.5,8.25 69.5,8.25 74.5,8.25 79.5,8.25 84.5,8.25 89.5,8.25 94.5,8.25 57,10.75 62,10.75 67,10.75 72,10.75 77,10.75 82,10.75 87,10.75 92,10.75 96.5,10.75 79.5,13.25 84.5,13.25 89.5,13.25 94.5,13.25 57,15.5 62,15.5 67,15.5 72,15.5 82.5,17 87.5,17 91.5,17 96.5,17 59.5,18 64.5,18 69.5,18 74.5,18 86.5,19.5 91.5,19.5 96.5,19.5 57,20.5 62,20.5 67,20.5 72,20.5 77,20.5 89,22 94,22 59.5,23 64.5,23 69.5,23 74.5,23 79.5,23 91.5,24.5 96.5,24.5 77,25.5 82,25.5 14.3,26 22.2,26 18.25,26.75 60.5,27.5 65.5,27.5 70.5,27.5 75.5,27.5 93,28.75 96.5,28.75 57.639,29.791 63,30 68,30 73,30 78,30 83,30 88,30 60.139,32.291 65.5,32.5 70.5,32.5 75.5,32.5 80.5,32.5 85.5,32.5 90.5,32.5 95.5,32.5 57.639,34.791 68,35 73,35 78,35 83,35 88,35 93,35 60.139,37.291 65.5,37.5 70.5,37.5 75.5,37.5 80.5,37.5 85.5,37.5 90.5,37.5 95.5,37.5 57.639,39.791 68,40 73,40 78,40 83,40 88,40 93,40 34.75,42 36.5,42 60.139,42.291 65.5,42.5 70.5,42.5 75.5,42.5 80.5,42.5 85.5,42.5 90.5,42.5 95.5,42.5 57.639,44.791 68,45 73,45 78,45 83,45 88,45 93,45 26.5,45.75 60.139,47.291 65.5,47.5 70.5,47.5 75.5,47.5 80.5,47.5 85.5,47.5 90.5,47.5 95.5,47.5 20.8,48.45 57.639,49.791 68,50 73,50 78,50 83,50 88,50 93,50 20.75,51.327 60.139,52.291 65.5,52.5 70.5,52.5 75.5,52.5 80.5,52.5 85.5,52.5 90.5,52.5 95.5,52.5 57.639,54.791 68,55 73,55 78,55 83,55 88,55 61,55.5 64,55.5 92.25,55.75 60,56 70.5,57.5 75.5,57.5 80.5,57.5 85.5,57.5 98,58.25 87.75,59.25 94.5,59.75 68,60 73,60 78,60 83,60 59.345,60.038 60.615,60.038 75.5,62.5 80.5,62.5 85.5,62.5 103.25,63.25 91.75,63.75 56.75,64 62,64 66.25,64 98.25,64 75,64.75 78,65 83,65 85.25,66.5 87.5,66.5 71,66.75 80.5,67.5 61.75,68.25 63.75,68.25 65,68.25 66.25,68.25 94.25,68.25 63.75,69.25 65,69.25 66.25,69.25 73.5,69.25 100.5,69.25 59.5,69.5 80,69.5 54.745,69.749 83,70 49.345,70.75 63.25,70.75 66.5,70.75 67.75,70.75 65.087,70.795 99,71.5 62.25,72 64,72 66,72 67.75,72 72.25,72 81.75,72.25 57.8,72.75 96.673,72.75 21.5,72.9 76,73.25 62,73.5 63.5,73.5 67.5,73.5 69,73.5 85.25,73.5 87.25,73.5 92.25,73.5 102.25,73.5 65.75,74.5 17.8,74.7 99.8,74.7 57.802,75 84.25,75 89.25,75 95,75 72.25,75.25 80,75.25 98.75,75.25 60.75,76 64.75,76 57.75,76.5 71.75,76.5 80,77.25 91.5,77.25 100.75,77.75 58.75,78.5 71.5,78.5 9.5,78.75 62,78.75 63.5,78.75 87.75,78.75 97.75,79 58.75,79.5 84.105,79.719 16.5,79.75 19,79.75 80,80 65.5,80.25 70,80.25 89,81 57.75,81.5 70,81.75 74,82 64,82.5 68.25,82.5 75.75,82.5 85.5,82.5 55,82.75 103.5,82.75 58.798,83.392 64,83.5 68.75,83.5 52,83.575 91.5,84.25 95.25,84.25 43.5,84.75 55,84.75 76,85.25 80.5,85.25 86,85.25 97.75,85.5 92.639,85.525 63.5,85.75 71.082,85.952 60.25,86.5 75,86.5 83.137,86.75 97.75,87 100.75,87 79,87.85 76.077,88 90,88.1 61.25,88.25 82.5,88.5 85.9,88.5 40.5,88.655 93.75,88.75 64.75,89 63.74,89.008 56.5,90 64,90 103.5,90 69,90.25 97.75,90.25 74.5,90.5 83.5,90.5 61.25,91 90.5,91 70.75,91.5 94.25,91.75 58.299,91.993 64.25,92 67.75,92 75.8,92.395 82.2,92.395 149.264,92.444 97.25,92.5 126.5,92.5 136.445,92.725 147.445,92.725 56.25,93.5 59.75,93.5 73.25,93.5 84.75,93.5 88,93.5 107,93.5 91.5,93.75 105.5,93.75 78,94 121.75,94.25 142,94.5 134.05,94.75 145,94.75 94.75,95.25 102.75,95.25 100.75,95.75 70.75,96 82.25,96 88.05,96 134,96.25 145,96.25 123.25,96.5 131,96.5 112.25,97 91.5,97.25 97,97.5 100.25,97.5 136,97.5 62,97.75 64.46,98.035 67,98.035 68.27,98.035 88.1,98.25 143,98.25 104.75,98.5 90,99 120,99 72.25,99.25 78.5,99.25 83.5,99.25 94.75,99.25 115.75,99.25 149.25,99.25 56.5,99.475 103,99.5
GND_INV: C23.2 C24.1 C25.1 C26.2 C27.2 C28.1 C29.1 C39.1 C40.1 C41.1 C42.2 C43.1 C54.1 C55.2 C56.1 C57.1 C58.2 C60.1 C61.1 C63.2 D5.2 IC4.1 IC6.2 IC6.8 IC7.5 IC8.9 IC8.19 IC8.20 IC8.21 IC8.22 IC8.23 IC8.24 IC8.25 IC8.26 IC8.27 IC9.2 IC9.8 J9.2 J13.A1/B12 J13.A12/B1 LED10.2 PS3.7 PS4.2 PS4.4 R9.1 R15.2 R16.2 R18.2 R31.1 R37.1 R38.1 R60.1 R62.1 R64.1 R69.1 S2.1 S3.1 TP10.1 U3.5 U4.5 | length 68.3
  Top Layer w0.3: IC4.1@27.14,1.55 27.45,1.55 v1(28,1) ; IC9.2@47.15,59.35 47.168,59.368 47.168,60.118 47.275,60.224 47.275,60.474 v1(47.375,60.574) ; IC6.2@50.65,59.35 50.725,59.425 50.725,59.875 50.737,59.887 v1(50.737,60.554) ; v1(96,26.75) R18.2@116.173,26.75
  Top Layer w0.5: v1(6.425,5.025) 6.575,5.175 7.025,5.175 7.075,5.225 7.825,5.225 v1(7.875,5.275) ; v1(10.475,4.325) 11.482,4.325 11.532,4.375 11.775,4.375 v1(11.925,4.525) ; C63.2@54.698,72.752 v1(54.7,72.75)
  Bottom Layer w0.3: 55,25.75 74.98,25.75 75.98,26.75 v1(96,26.75)
  other v1: 0.75,0.75 5.75,0.75 26,0.75 44.5,0.75 50,0.75 55,0.75 11.827,0.859 39,1 19.25,1.5 35.5,1.698 23,2.75 9.25,3 30.25,3 6.5,4 14.75,4 16.427,4.001 9.75,5.25 10.75,5.25 20.75,5.5 37.25,6.25 44.5,6.25 50,6.25 55,6.25 4.205,6.407 39,6.5 34.25,6.75 9.175,6.8 25.72,6.851 32,7 11.75,7.25 6.5,7.75 8.675,7.775 9.675,7.775 35.75,8.302 8.5,9 16,9 0.75,9.25 4.5,9.5 43,10.5 50,11.25 55,11.25 22.5,11.5 25.25,11.5 40.5,11.5 31,13.25 34.377,13.719 37.25,14 32.5,14.75 44.75,15 49.75,15 55,15 26.25,15.75 28.75,16.5 35,16.5 36.5,16.5 43,16.5 40,16.75 46.25,18.75 53.25,18.75 26,19.75 30.25,21 42.75,21.5 23,21.75 37,21.75 49.75,22.25 26.75,23.25 17,24 19.5,24.25 32,24.5 22,24.75 46.25,25.75 53.25,25.75 0.75,26 3.25,26 13,26 23.75,26 29,26 41.75,26 17.103,26.048 16.148,28.426 22.75,28.5 28,28.5 33.5,28.5 40.5,28.5 46.25,28.75 53.25,28.75 9,31.25 25.25,31.5 17.85,32 30.5,32 49.75,32.25 13.5,32.5 37.5,32.75 43,32.75 3.234,33.087 7.5,35 0.75,35.25 46.25,35.75 53.25,35.75 41.25,37.25 10.75,37.5 39.5,39 49.75,39.25 24.75,39.5 32.75,39.5 3.25,40 17.85,40 11.25,40.25 29.75,40.5 35.25,40.5 13.5,40.75 18,41.75 43,42 9.5,42.25 46.25,42.75 53.25,42.75 28.75,43.5 36.75,43.75 13,44.25 21.75,44.25 26.289,44.469 0.75,44.5 32.5,45.25 3.5,45.5 19.25,45.75 16.25,46 49.75,46.25 24,46.5 9.5,46.75 21.5,47.25 41.25,47.25 46.5,47.5 29.25,49.25 13.25,49.75 19.5,49.75 53.25,49.75 24.25,50.5 36.75,50.5 49.873,50.496 8,50.75 43.75,50.75 10.75,52 3.5,52.25 15.75,52.75 50.5,52.75 32,53 55.12,53.007 26.25,53.5 0.75,53.75 18,54.25 21.077,55 53.634,54.999 6.75,55.25 37,55.75 14.75,56.25 47.8,56.75 51.3,56.75 24.75,57.25 20.5,57.5 3.5,58.25 44,58.25 18.5,58.5 52.962,58.796 40.75,59 29.427,59.613 16.595,60.038 10,60.75 48.5,60.75 54.5,60.75 35.156,60.872 22.107,61.088 40,62.25 3.25,62.5 30.5,62.5 0.75,63 10,63.25 35.25,63.5 45,64 24.75,64.75 30.75,64.75 15.356,64.92 49.345,65.25 7.22,65.329 11.5,65.5 45,65.7 42.2,65.75 54.75,66.25 39,66.5 17.75,67 3,67.5 20,68.5 27.75,68.5 37.25,68.5 39.75,68.5 48.75,68.75 7.75,69 42.25,69 10.5,69.25 15.25,69.5 45.5,70 23.25,70.5 27,70.5 41,70.75 45.5,71 0.75,72.25 14,72.25 26.5,72.25 34,72.5 45,72.75 7.25,73 48.5,73 3.25,73.5 20,73.5 28.75,75 31.3,75 32.4,75 33.5,75 40,75 54.698,75 26,75.25 37,75.25 38.5,75.25 44.425,75.307 9.409,75.406 21.75,75.75 31.3,76.1 32.4,76.1 33.5,76.1 3.077,76.823 31.3,77.2 32.4,77.2 33.5,77.2 14.75,77.75 52,77.75 12,78 19,78.25 40.75,78.25 46.5,78.325 54.75,79 27.5,79.25 43.75,80 35.5,80.5 3,80.75 7.5,80.75 18.75,81.25 0.75,81.5 48.5,81.5 22.75,81.75 42.11,81.9 6.5,82.75 15.969,82.994 30,83 28.75,83.25 42.25,83.5 25.85,84 14,84.25 37.75,84.25 32.5,84.5 19,85.5 32.5,85.5 48.5,85.5 52.5,85.75 2.75,86 29.753,86.225 9.75,86.25 32,86.75 55.25,86.75 23.5,87 17,87.85 32.75,88 44,88 46.5,88.325 35,88.655 37.75,89 40.25,89.75 12.5,90.25 21.5,90.25 0.75,90.75 8.75,90.75 25,91.25 32.5,91.5 55.25,91.5 50.75,92 13.8,92.395 20.2,92.395 44.5,92.5 33.75,93 11.25,93.25 22.75,93.25 16.25,93.5 26.75,93.5 37.5,94.25 40.5,94.25 23.25,95.4 10.75,95.448 13.5,95.5 20.5,95.75 24.75,96.75 28.5,96.75 33,97 22.5,97.5 41,97.75 48.25,97.75 55,97.75 9.25,98 13.5,98 20.25,98 0.75,99.25 9.25,99.5 20.25,99.5 27.5,99.5
HLDO_OUT_BATsense: AT1_BATsense.5 C46_BATsense.2 C47_BATsense.1 | length 3.5
  Top Layer w0.2: C47_BATsense.1@143.5,79.75 C46_BATsense.2@143.5,81.25 ; C46_BATsense.2@143.635,81.25 AT1_BATsense.5@143.635,83.275
HLDO_OUT_LOADsense: AT1_LOADsense.5 C46_LOADsense.2 C47_LOADsense.1 | length 3.6
  Top Layer w0.2: C47_LOADsense.1@132.5,79.75 C46_LOADsense.2@132.5,81.25 132.635,81.385 AT1_LOADsense.5@132.635,83.275
HSE_OSC_IN: C6.2 IC1.5 Y2.3 | length 6.8
  Top Layer w0.2: C6.2@58.75,86.5 58.75,85.14 58.89,85 59.75,85 60.25,84.5 60.25,83.5 60.75,83 IC1.5@62.762,83
HSE_OSC_OUT: IC1.6 R1.1 | length 3
  Top Layer w0.2: R1.1@60,82 60,82.05 60.15,82.2 60.2,82.2 60.5,82.5 IC1.6@62.762,82.5
HV_BAT+: J6.1 PS5.2 R48_BATsense.1 RT1.2 | length 41.7
  Top Layer w0.5: R48_BATsense.1@123.25,51.448 123.25,45.25 J6.1@124.5,44
  PWR-Layer w1: PS5.2@111,50.45 117.45,44 J6.1@124.5,44 124.5,46.75 132.75,55 RT1.2@135.884,55
HV_BAT-: AT1_BATsense.2 AT1_BATsense.7 AT1_BATsense.8 AT1_LOADsense.2 AT1_LOADsense.7 AT1_LOADsense.8 C45_BATsense.1 C45_LOADsense.1 C46_BATsense.1 C46_LOADsense.1 C47_BATsense.2 C47_LOADsense.2 C50_BATsense.1 C50_LOADsense.1 C51_BATsense.1 C51_LOADsense.1 C52_BATsense.2 C52_LOADsense.2 J6.3 PS5.1 R55_BATsense.1 R55_LOADsense.1 | length 122.2
  Top Layer w0.2: AT1_LOADsense.7@135.175,83.275 135.175,81.325 C45_LOADsense.1@135.25,81.25 136.027,80.473 v1(136.027,79.5) ; AT1_BATsense.7@146.175,83.275 146.209,83.241 146.209,81.291 C45_BATsense.1@146.25,81.25 147,80.5 R55_BATsense.1@147,79.741 ; R55_BATsense.1@147.027,79.5 v1(147.05,79.5)
  GND-Layer w0.8: 117.059,46.538 118.05,47.53 118.05,49.55
  GND-Layer w1: PS5.1@111,6 111,31.75 114.25,35 ; 117.059,46.538 117.059,46.309 114.25,43.5 114.25,35 ; 118.05,49.55 118.05,52.055 127,61.005 127,77.25 ; J6.3@143.5,44 143.5,38.25 140.25,35 114.25,35
  other v1: 127,79.75 128.25,79.75 129.5,79.75 131,79.75 138,79.75 139.25,79.75 140.5,79.75 142,79.75 131,81.25 142,81.25 128.825,83.275 136.445,83.275 139.825,83.275 147.445,83.275
HV_DCDC_OUT_BATsense: AT1_BATsense.1 AT1_BATsense.3 C50_BATsense.2 C51_BATsense.2 C52_BATsense.1 | length 7
  Top Layer w0.2: AT1_BATsense.1@138.555,83.275 138.33,83.05 138.33,82.33 138,82 C50_BATsense.2@138,81.25 C51_BATsense.2@139.25,81.25 140.1,81.25 C52_BATsense.1@140.5,81.25 141.095,81.845 AT1_BATsense.3@141.095,83.275
HV_DCDC_OUT_LOADsense: AT1_LOADsense.1 AT1_LOADsense.3 C50_LOADsense.2 C51_LOADsense.2 C52_LOADsense.1 | length 7
  Top Layer w0.2: AT1_LOADsense.1@127.555,83.275 127.33,83.05 127.33,82.33 127,82 C50_LOADsense.2@127,81.25 C51_LOADsense.2@128.25,81.25 129.1,81.25 C52_LOADsense.1@129.5,81.25 130.095,81.845 AT1_LOADsense.3@130.095,83.275
HV_L+: J6.2 R48_LOADsense.1 RD1.1 | length 29.2
  Top Layer w0.5: RD1.1@114.7,58.18 114.75,58.23 R48_LOADsense.1@114.75,60.448
  Bottom Layer w1: RD1.1@114.7,58.18 122.82,58.18 134,47 J6.2@134,44
IO2/STRAP/UART_ESP_TX: IC8.16 R58.1 U4.7 | length 21.5
  Top Layer w0.2: IC8.16@24.61,72.9 27.9,72.9 29.25,74.25 29.25,83.25 32.5,86.5 33.55,86.5 33.735,86.315 34.4,86.315 34.6,86.115 U4.7@35,86.115
IO8/STRAP: IC8.7 R59.1 | length 4.2
  Top Layer w0.2: IC8.7@42.11,78.9 43.65,78.9 44.5,79.75 R59.1@44.5,81.25
IO9/BOOT: IC8.8 R66.1 S3.2 | length 7.4
  Top Layer w0.2: IC8.8@42.11,80.4 43.15,80.4 43.5,80.75 43.5,82 43.75,82.25 R66.1@44.5,82.25 44.5,82.3 44.65,82.45 44.7,82.45 44.813,82.563 44.909,82.563 45.7,83.354 45.7,84.1 46.275,84.675 S3.2@46.5,84.675
LED_G: IC1.43 R36.1 | length 39
  Top Layer w0.2: v1(66.25,96) 66.25,95.946 66.38,95.816 66.38,91.48 66.75,91.11 IC1.43@66.75,86.488
  Bottom Layer w0.2: v1(38.85,98.75) 39.1,99 64.167,99 66.25,96.917 v1(66.25,96)
LED_R: IC1.30 R34.1 | length 50.2
  Top Layer w0.2: R34.1@38.827,95.75 38.827,84.184 39,84.011 v1(39,84) ; IC1.30@71.238,82 72.75,82 73,82.25 v1(73,82.75)
  Bottom Layer w0.2: v1(39,84) 40,84 41.75,85.75 44.75,85.75 46.25,84.25 53,84.25 53.25,84 71.75,84 v1(73,82.75)
LED_Y: IC1.31 R35.1 U4.3 | length 46.5
  Top Layer w0.2: R35.1@38.827,97.25 39.397,97.25 39.75,96.897 39.75,95.25 39.25,94.75 39.25,88.235 40.1,87.385 U4.3@40.5,87.385 43.115,87.385 44.75,85.75 v1(44.75,83.75) ; v1(69.25,82.5) IC1.31@71.238,82.5
  Bottom Layer w0.2: v1(44.75,83.75) 45.875,82.625 50.75,82.625 51.875,81.5 56.75,81.5 57.225,81.975 58.058,81.975 58.283,81.75 68.5,81.75 v1(69.25,82.5)
LSE_OSC_IN: C7.2 IC1.3 Y1.2 | length 7.7
  Top Layer w0.2: C7.2@62.75,89.75 62.75,88.5 Y1.2@62.5,88.25 62.5,87.85 61.35,86.7 61.35,84.15 61.5,84 IC1.3@62.762,84
LSE_OSC_OUT: C8.2 IC1.4 Y1.1 | length 8.4
  Top Layer w0.2: C8.2@59.75,89.75 59.75,88.5 Y1.1@60,88.25 60,87.85 61,86.85 61,83.75 61.25,83.5 IC1.4@62.762,83.5
MC_EN: IC1.28 IC5.4 R26.2 | length 29.7
  Top Layer w0.2: IC5.4@61.885,65.462 61.885,67.115 R26.2@61.75,67.25 62.25,67.25 62.5,67.5 v1(62.5,70.25) ; IC1.28@71.238,81 72.75,81 74,79.75 v1(74,70.25)
  Bottom Layer w0.2: v1(62.5,70.25) v1(74,70.25)
MC_INT: IC1.15 IC5.8 R22.1 | length 19.8
  Top Layer w0.2: IC5.8@56.805,65.462 56.75,65.517 R22.1@56.75,67.25 57.25,67.25 57.5,67.5 v1(57.5,71) ; v1(65.25,73) IC1.15@65.25,78.012
  Bottom Layer w0.2: v1(57.5,71) 59.475,72.975 65.225,72.975 v1(65.25,73)
MC_RX_MOSI: IC1.29 IC5.7 | length 35.1
  Top Layer w0.2: IC5.7@58.075,65.462 58.075,68.757 58.25,68.932 v1(58.25,69) ; IC1.29@71.238,81.5 73.25,81.5 74.5,80.25 v1(74.5,69)
  Bottom Layer w0.2: v1(58.25,69) 58.5,68.75 74.25,68.75 v1(74.5,69)
MC_RX_NSS: IC1.26 IC5.6 R23.1 | length 29.1
  Top Layer w0.2: R23.1@59.25,67.25 59.345,67.155 IC5.6@59.345,65.462 ; R23.1@59.345,67.25 59.75,67.25 60.149,67.649 v1(60.149,72.5) ; IC1.26@71.238,80 72.075,80 72.925,79.15 72.925,72.684 72.899,72.657 72.899,72.548 v1(72.851,72.5)
  Bottom Layer w0.2: v1(60.149,72.5) v1(72.851,72.5)
MC_RX_SCK: IC1.27 IC5.5 | length 29.3
  Top Layer w0.2: IC5.5@60.615,65.462 60.615,70.816 60.75,70.951 v1(60.75,71) ; IC1.27@71.238,80.5 72.5,80.5 73.5,79.5 73.5,75.502 73.405,75.407 v1(73.405,71.342)
  Bottom Layer w0.2: v1(60.75,71) 61.092,71.342 v1(73.405,71.342)
MC_TX_MOSI: IC1.42 IC5.3 | length 39.2
  Top Layer w0.2: IC5.3@63.155,65.462 63.155,69.587 63.25,69.682 v1(63.25,69.75) ; v1(67.25,85) IC1.42@67.25,86.488 ; v1(74.25,82.75) 75.2,81.8 75.2,74.795 75.25,74.745 v1(75.25,69.75)
  Bottom Layer w0.2: v1(63.25,69.75) v1(75.25,69.75) ; v1(67.25,85) 72,85 v1(74.25,82.75)
MC_TX_NSS: IC1.12 IC5.2 | length 14.7
  Top Layer w0.2: IC1.12@62.762,79.5 62.762,72.313 64.425,70.65 IC5.2@64.425,65.462
MC_TX_SCK: IC1.13 IC5.1 | length 13.1
  Top Layer w0.2: IC1.13@64.25,78.012 64.25,72.472 65.695,71.027 IC5.1@65.695,65.462
NetAT1_BATsense_13: AT1_BATsense.13 AT1_BATsense.16 C53_BATsense.1 | length 5.9
  Top Layer w0.3: C53_BATsense.1@138.5,94.75 138.5,92.78 v1(138.555,92.725)
  Bottom Layer w0.2: v1(138.555,92.725) v1(142.365,92.725)
NetAT1_LOADsense_13: AT1_LOADsense.13 AT1_LOADsense.16 C53_LOADsense.1 | length 5.9
  Top Layer w0.3: C53_LOADsense.1@127.5,94.75 127.5,92.78 v1(127.555,92.725)
  Bottom Layer w0.2: v1(127.555,92.725) v1(131.365,92.725)
NetC4_1: C4.1 J1.Shell R6.2 | length 21.6
  Top Layer w0.5: J1.Shell@83.32,97.145 83.32,96.68 84,96 C4.1@84.95,96 84.95,97.398 84.948,97.4 R6.2@84.948,98.25
  Bottom Layer w0.5: J1.Shell@74.68,92.965 J1.Shell@74.68,97.145 J1.Shell@83.32,97.145 J1.Shell@83.32,92.965
NetC35_2: C35.2 R24.1 R25.1 | length 2.6
  Top Layer w0.25: R25.1@60.173,58.25 60,58.077 C35.2@60,57 60.948,57 61.173,56.775 R24.1@61.173,56.75
NetC37_2: C37.2 T1.5 | length 1.6
  Top Layer w0.2: T1.5@18.25,24.19 18.25,25.5 C37.2@18.25,25.75
NetC42_1: C42.1 R27.1 R28.1 R29.1 R30.1 | length 6.1
  Top Layer w0.2: R29.1@39.5,57.827 R30.1@41,57.827 42.077,57.827 C42.1@42.5,58.25 R28.1@42.5,56.827 R27.1@44,56.827
NetC58_1: C58.1 J13.Shell R64.2 | length 23.1
  Top Layer w0.5: R64.2@10.75,98.552 12.198,98.552 12.584,98.166 12.584,97.241 J13.Shell@12.68,97.145 ; J13.Shell@21.32,97.145 21.338,97.163 21.338,98.088 21.821,98.571 23.229,98.571 C58.1@23.25,98.55
  Bottom Layer w0.5: J13.Shell@12.68,92.965 J13.Shell@12.68,97.145 J13.Shell@21.32,97.145 J13.Shell@21.32,92.965
NetD1_4: D1.4 J1.A7 J1.B7 | length 4.7
  Top Layer w0.2: J1.A7@78.75,92.395 78.75,93 79,93.25 79.5,93.25 79.75,93 J1.B7@79.75,92.395 79.75,91.25 79.95,91.05 D1.4@79.95,90.15
NetD1_6: D1.6 J1.A6 J1.B6 | length 4.3
  Top Layer w0.2: D1.6@78.05,90.15 78.05,91.05 78.25,91.25 ; J1.B6@78.25,92.395 78.25,91.825 78.25,91.25 ; J1.A6@79.25,92.395 79.25,91.5 79,91.25 78.25,91.25
NetD4_2: D4.2 Q1.3 RD1.4 | length 11.9
  Top Layer w0.3: Q1.3@100.75,72.3 100,71.55 D4.2@100,70.75 100,70.25 99.5,69.75 99.5,68 102,65.5 RD1.4@102,62
NetD5_1: D5.1 R63.1 | length 1.8